# Altium PCB Inchworm_v0.PcbDoc
Units mil, origin at the board's own origin, x right, y up, seen from the top; angles counter-clockwise.
Board outline 1175 x 775 mil, 2 copper layers (Top Layer, Bottom Layer); 41 components, 39 nets, 141 pads, 18 vias.
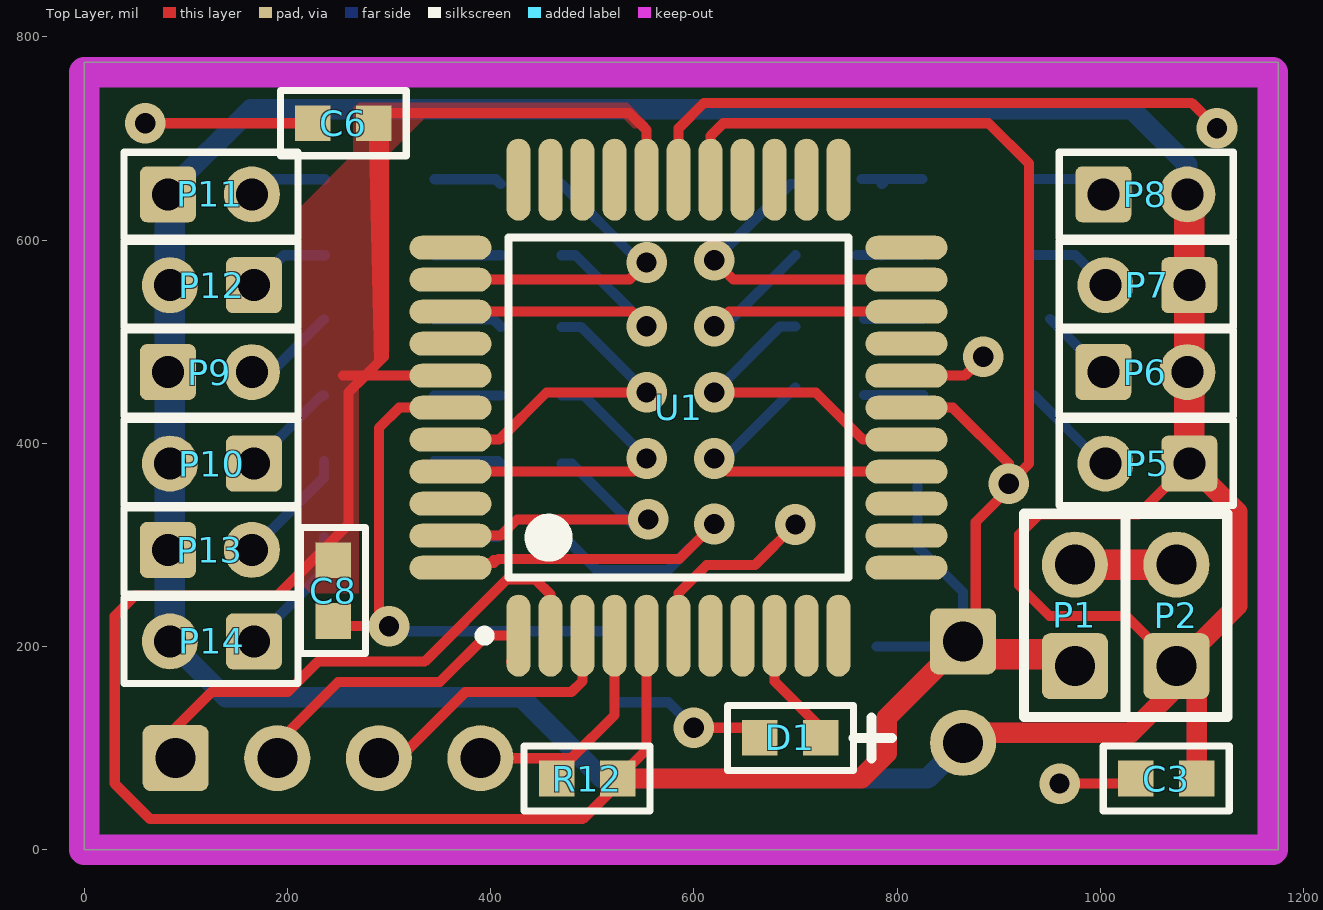
[diagram p0: Top Layer view]
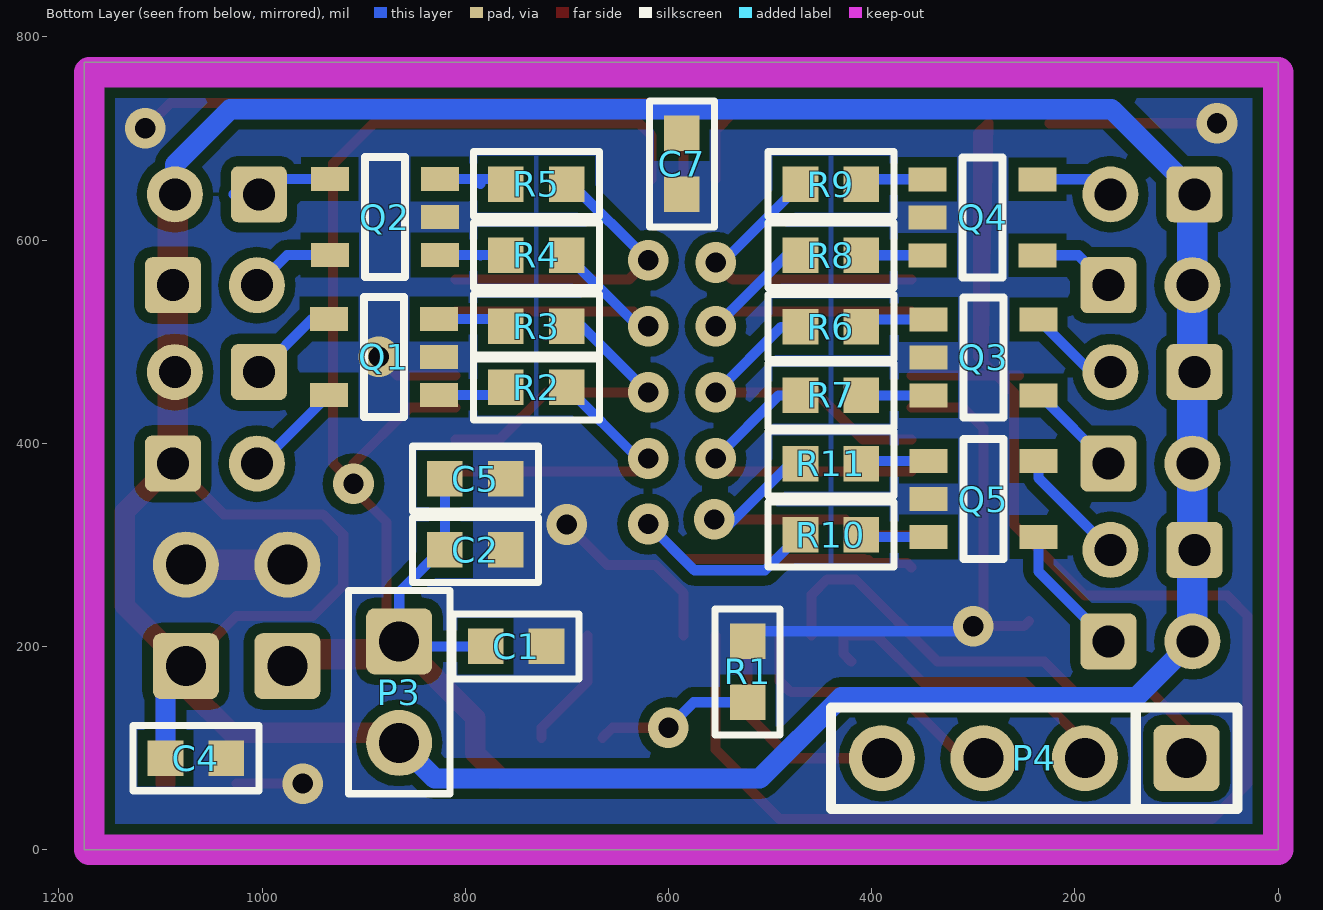
[diagram p1: Bottom Layer view, seen from below]
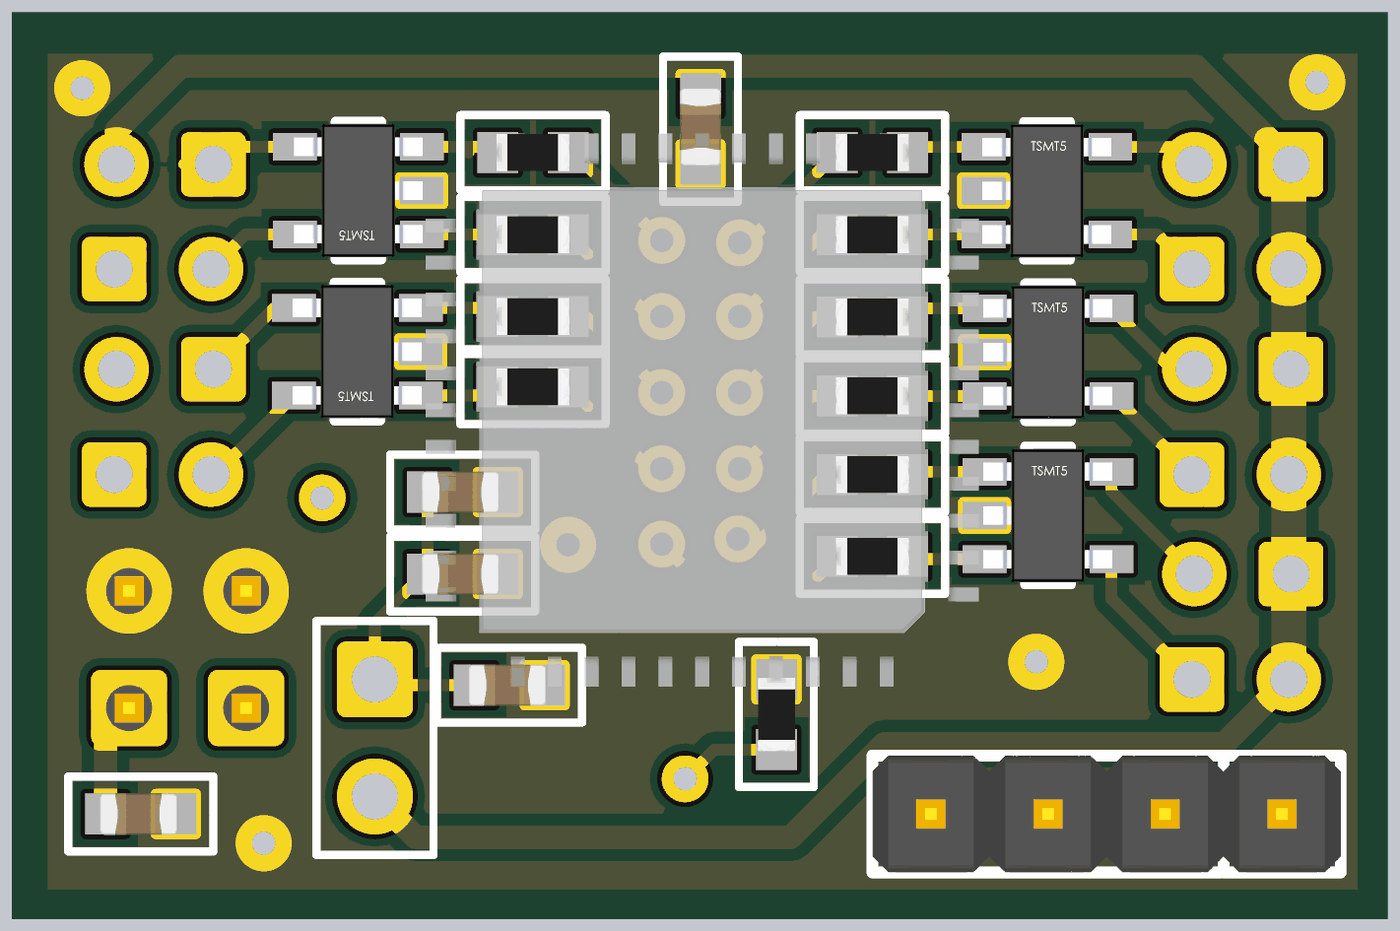
[diagram p2: 3D render of the assembled board from below, using the file's embedded part models]

## Layer stack, top to bottom
Top Solder: solder mask 0.4, Solder Resist, Dk 3.5
Top Layer: signal copper 1.4
Dielectric 1: dielectric 12.6, FR-4, Dk 4.8
Bottom Layer: signal copper 1.4
Bottom Solder: solder mask 0.4, Solder Resist, Dk 3.5

## Board outline
0,0 0,775 1175,775 1175,0

## Design rules (kind name [scope] priority, off if disabled: settings)
Clearance [All] p1: gap=10 ignorepadtopadclearanceinfootprint=TRUE except(0: Arc-Hole Track-Hole SMDPad-Hole THPad-Hole Via-Hole Fill-Hole Poly-Hole Region-Hole Text-Hole)
ComponentClearance [All] p1 off: gap=10 collisioncheckmode=3 verticalgap=10 showdistances=FALSE
HoleSize [All] p1: absolutevalues=TRUE maxlimit=500 minlimit=1 maxpercent=80.000 minpercent=20.000
MinimumSolderMaskSliver [All] p1: minsoldermaskwidth=4
PolygonConnect [All] p1: connectstyle=Direct reliefconductorwidth=10 reliefentries=4 polygonreliefangle="90 Angle" airgapwidth=10
RoutingVias [All] p1: holewidth=20 width=40 viastyle="Through Hole" minholewidth=20 minwidth=40 maxholewidth=28 maxwidth=50
SilkToSilkClearance [All] p1 off: silktosilkclearance=10
SilkToSolderMaskClearance [IsPad] p1 off: minsilkscreentomaskgap=10 clearancetoexposedcopper=TRUE
SolderMaskExpansion [All] p1: expansion=4
Width [All] p1: maxlimit=50 minlimit=10 preferedwidth=10 minimp=50.000000 maximp=50.000000 favimp=50.000000
25 further rules are at their usual default settings.

## Components (designator, comment, footprint, x,y, rotation, side; value= is the part's Value field where it differs from the comment)
C1 "Cap" SMD0603_CAP 750,200 r0 bottom value=2.2uF
C2 "Cap" SMD0603_CAP 790,295 r0 bottom value=100nF
C3 "Cap" SMD0603_CAP 1065,70 r0 top value=10uF
C4 "Cap" SMD0603_CAP 1065,90 r0 bottom value=100nF
C5 "Cap" SMD0603_cap 790,365 r0 bottom value=2.2uF
C6 "Cap" SMD0603_cap 255,715 r0 top value=10uF
C7 "Cap" SMD0603_cap 586.81,675 r90 bottom value=10uF
C8 "Cap" SMD0603_cap 245,255 r90 top value=100nF
D1 "LED" "SMD0603 POLARIZED" 695,110 r180 top
P1 "PWR1" "HEADER 2X1" 975,180.51 r90 top
P2 "PWR2" "HEADER 2X1" 1075,180.51 r90 top
P3 "Via 2x1" "VIA 2X1" 865,205 r270 bottom
P4 "PRGM" "HEADER 4X1" 90,90 r0 bottom
P5 "Header" "VIA 2X1_SMALL" 1046.34,380 r180 top
P6 "Header" "VIA 2X1_SMALL" 1044.34,470 r0 top
P7 "Header" "VIA 2X1_SMALL" 1046.34,555.51 r180 top
P8 "Header" "VIA 2X1_SMALL" 1044.34,645 r0 top
P9 "Header" "VIA 2X1_SMALL" 123.66,470 r0 top
P10 "Header" "VIA 2X1_SMALL" 125.66,380 r180 top
P11 "Header" "VIA 2X1_SMALL" 123.66,645 r0 top
P12 "Header" "VIA 2X1_SMALL" 125.66,555.51 r180 top
P13 "Header" "VIA 2X1_SMALL" 123.66,295 r0 top
P14 "Header" "VIA 2X1_SMALL" 125.66,205 r180 top
Q1 "QS5W1" TSMT5 880,485 r0 bottom
Q2 "QS5W1" TSMT5 879.13,622.6 r0 bottom
Q3 "QS5W1" TSMT5 290,484.49 r180 bottom
Q4 "QS5W1" TSMT5 290.87,622.4 r180 bottom
Q5 "QS5W1" TSMT5 290,345 r180 bottom
R1 "Res" SMD0603_RES 522.01,175 r270 bottom value=470
R2 "Res" SMD0603_RES 730,455 r180 bottom value=470
R3 "Res" SMD0603_RES 730,515 r180 bottom value=470
R4 "Res" SMD0603_RES 730,585 r180 bottom value=470
R5 "Res" SMD0603_RES 730,655 r180 bottom value=470
R6 "Res" SMD0603_RES 440,514.49 r0 bottom value=470
R7 "Res" SMD0603_RES 440,447.09 r0 bottom value=470
R8 "Res" SMD0603_RES 440,585 r0 bottom value=470
R9 "Res" SMD0603_RES 440,655 r0 bottom value=470
R10 "Res" SMD0603_RES 440,310 r180 bottom value=470
R11 "Res" SMD0603_RES 440,380 r180 bottom value=470
R12 "Res" SMD0603_RES 495,70 r0 top value=100k
U1 "ATMega164A-AUR" TQFP44 585,435 r90 top

## Footprints (in the part's own frame and the unit in brackets; to place one, negate y for a bottom-side part, rotate by r counter-clockwise, add the part's x,y. Pads: shape width x height; smd on the part's side, far side on the other; paste and mask are expansions set on the pad)
"HEADER 2X1" [mil] "PinHeader 1x2 TH Pitch 2.54mm"
  rrect25% 65x65 hole 39.37: 1(0,0)
  round 65 hole 39.37: 2(100,0)
  silkscreen extent -50,-50 150,50, body extent -50,-50 150,50, height 374
"HEADER 4X1" [mil] "PinHeader 1x4 TH Pitch 2.54mm"
  rrect25% 65x65 hole 39.37: 1(0,0)
  round 65 hole 39.37: 2(100,0) 3(200,0) 4(300,0)
  silkscreen extent -50,-50 350,50, body extent -50,-50 350,50, height 374
"SMD0603 POLARIZED" [mil]
  rect 35x35 smd: 1(-30,0) 2(30,0)
  silkscreen extent -100,-32 62,32, body extent -31,-16 32,16, height 18
SMD0603_CAP [mil]
  rect 35x35 smd: 1(-30,0) 2(30,0)
  silkscreen extent -62,-32 62,32, body extent -31,-18 35,18, height 35
SMD0603_cap [mil]
  rect 35x35 smd: 1(-30,0) 2(30,0)
  silkscreen extent -62,-32 62,32, body extent -31,-18 35,18, height 35
SMD0603_RES [mil]
  rect 35x35 smd: 1(-30,0) 2(30,0)
  silkscreen extent -62,-32 62,32, body extent -31,-16 31,16, height 18
TQFP44 [mm] "Thin QFP, 44-Leads, Body 10x10mm, Pitch 0.8mm, IPC Low Density"
  oval 2.05x0.6 smd: 1(-5.7,4) 2(-5.7,3.2) 3(-5.7,2.4) 4(-5.7,1.6) 5(-5.7,0.8) 6(-5.7,0) 7(-5.7,-0.8) 8(-5.7,-1.6) 9(-5.7,-2.4) 10(-5.7,-3.2) 11(-5.7,-4) 23(5.7,-4) 24(5.7,-3.2) 25(5.7,-2.4) 26(5.7,-1.6) 27(5.7,-0.8) 28(5.7,0) 29(5.7,0.8) 30(5.7,1.6) 31(5.7,2.4) 32(5.7,3.2) 33(5.7,4)
  oval 0.6x2.05 smd: 12(-4,-5.7) 13(-3.2,-5.7) 14(-2.4,-5.7) 15(-1.6,-5.7) 16(-0.8,-5.7) 17(0,-5.7) 18(0.8,-5.7) 19(1.6,-5.7) 20(2.4,-5.7) 21(3.2,-5.7) 22(4,-5.7) 34(4,5.7) 35(3.2,5.7) 36(2.4,5.7) 37(1.6,5.7) 38(0.8,5.7) 39(0,5.7) 40(-0.8,5.7) 41(-1.6,5.7) 42(-2.4,5.7) 43(-3.2,5.7) 44(-4,5.7)
  silkscreen extent -5.82,-4.25 4.25,4.97, body extent -6,-6.01 6,5.99, height 0.5
TSMT5 [mm] "SOT23, 5-Leads, Body 2.90x2.80mm, Pitch 0.95mm, IPC Medium Density"
  rect 0.95x0.6 smd: 1(-1.375,0.95) 2(-1.375,0) 3(-1.375,-0.95) 4(1.375,-0.95) 5(1.375,0.95)
  silkscreen extent -0.5,-1.5 0.5,1.5, body extent -1.4,-1.45 1.4,1.45, height 1.05
"VIA 2X1" [mil]
  rrect25% 65x65 hole 39.37: 1(0,0)
  round 65 hole 39.37: 2(100,0)
  silkscreen extent -50,-50 150,50
"VIA 2X1_SMALL" [mm] "Via holes for pair of 22-26AWG"
  rrect25% 1.4x1.4 hole 0.8: 1(-1.05,0)
  round 1.4 hole 0.8: 2(1.05,0)
  silkscreen extent -2.15,-1.1 2.2,1.05

## Part data
C1 C2 C3 C4 C5 C6 C7 C8: library part "Capacitor Ceramic", "Ceramic Chip Capacitor"
P1 P2 P5 P6 P7 P8 P9 P10 P11 P12 P13 P14: library part "Header 2x1", "Header, 2-Pin"
P4: library part "Header 4x1"
Q1 Q2 Q3 Q4 Q5: "Two Medium-Power NPN BJTs with Common Emitter.  Rohm Semi."
R1 R2 R3 R4 R5 R6 R7 R8 R9 R10 R11 R12: library part Resistor, "Resistor"

## Via types
v1: diameter 40, hole 20, Top Layer to Bottom Layer, 18 vias

## Nets (pads, with @x,y where several pads share a name; then routed paths per layer and width w, separated by ;. In a path a pad name is that pad's centre, name@x,y a point inside that pad or via, vN(x,y) a via of type N, cw(c..) or ccw(c..) an arc to the next point about the centre after c; other vN are vias at no path point)
GND: C1.1 C2.1 C3.1 C4.1 C5.1 C6.1 C7.1 C8.1 P1.2 P2.2 Q1.2 Q2.2 Q3.2 Q4.2 Q5.2 R1.1 U1.6 U1.18 U1.28 U1.39 | length 1761.5
  Top Layer w10: v1(60,715) C6.1 ; C8.1 250,220 v1(300,220) 290,230 290,415 310,435 U1.39 ; U1.6 585,252.52 612.48,280 660,280 v1(700,320) ; U1.28 585,710 610,735 1090,735 v1(1115,710) ; U1.18 866.5,466.5 v1(885,485) ; v1(960,65) C3.1@1025,65
  Top Layer w30: P1.2 P2.2
  Bottom Layer w10: v1(300,220) 300,215 R1.1@522.01,215
M1: R10.1 U1.44 | length 462.2
  Top Layer w10: U1.44 365.28,282.2 403.03,282.2 403.03,285 406.72,285 407.66,285.95 585.43,285.95 v1(620,320.51)
  Bottom Layer w10: R10.1 505,275 574.49,275 v1(620,320.51)
M2: R11.1 U1.43 | length 313
  Top Layer w10: U1.43 410,309.02 425.98,325 v1(555,325)
  Bottom Layer w10: R11.1 480,380 540,320 545,325 v1(555,325)
MISO: P4.1 U1.2 | length 506.1
  Top Layer w10: P4.1 90,120 125,155 200,155 230,185 335,185 415.94,265.95 444.06,265.95 459.02,250.98 U1.2
MOSI: P4.2 U1.1 | length 325
  Top Layer w10: P4.2 190,105 250,165 350,165 395.59,210.59 U1.1 427.52,192.52 U1.1@420,185
NetD1_1: D1.1 U1.9 | length 119.4
  Top Layer w10: U1.9 679.49,165.51 725,120 D1.1
NetD1_2: D1.2 R1.2 | length 168.8
  Top Layer w10: v1(600,120) 655,120 D1.2
  Bottom Layer w10: R1.2 575,145 v1(600,120) v1@592.01,112.01
NetP5_2: P5.2 Q1.5 | length 95.6
  Bottom Layer w10: Q1.5 P5.2@1001.73,380
NetP6_1: P6.1 Q1.4 | length 74.1
  Bottom Layer w10: Q1.4@950.6,522.4 P6.1
NetP7_2: P7.2 Q2.5 | length 84
  Bottom Layer w10: Q2.5 975.31,585.2 P7.2
NetP8_1: P8.1 Q2.4 | length 75.9
  Bottom Layer w10: Q2.4 P8.1@988,660 ; P8.1@1013,660 P8.1@1028,645
NetP9_2: P9.2 Q3.5 | length 92.4
  Bottom Layer w10: P9.2 183.98,470 Q3.5
NetP10_1: P10.1 Q3.4 | length 96.7
  Bottom Layer w10: P10.1 234.09,447.09 Q3.4
NetP11_2: P11.2 Q4.5 | length 77.9
  Bottom Layer w10: P11.2 179.8,659.8 Q4.5
NetP12_1: P12.1 Q4.4 | length 81.9
  Bottom Layer w10: P12.1 196.49,585 Q4.4
NetP13_2: P13.2 Q5.5 | length 116.8
  Bottom Layer w10: P13.2 235.87,365.87 Q5.5
NetP14_1: P14.1 Q5.4 | length 131.1
  Bottom Layer w10: P14.1 235.87,273.87 Q5.4
NetQ1_1: Q1.1 R2.1 | length 58.5
  Bottom Layer w10: R2.1@767.4,447.6 Q1.1
NetQ1_3: Q1.3 R3.1 | length 58.5
  Bottom Layer w10: R3.1@767.4,522.4 Q1.3
NetQ2_1: Q2.1 R4.1 | length 65.1
  Bottom Layer w10: R4.1@760.2,585.2 Q2.1 ; 785,585 785.2,585.2
NetQ2_3: Q2.3 R5.1 | length 67.1
  Bottom Layer w10: R5.1@765,660 Q2.3 ; 785,655 790,660
NetQ3_1: Q3.1 R6.1 | length 68.9
  Bottom Layer w10: Q3.1 402.6,521.89 R6.1
NetQ3_3: Q3.3 R7.1 | length 65.9
  Bottom Layer w10: Q3.3 R7.1
NetQ4_1: Q4.1 R9.1 | length 67
  Bottom Layer w10: Q4.1 405.2,659.8 R9.1
NetQ4_3: Q4.3 R8.1 | length 65
  Bottom Layer w10: Q4.3 R8.1
NetQ5_1: Q5.1 R11.2 | length 66.9
  Bottom Layer w10: Q5.1 407.6,382.4 R11.2
NetQ5_3: Q5.3 R10.2 | length 66.9
  Bottom Layer w10: Q5.3 407.6,307.6 R10.2
RST: P4.4 R12.1 U1.4 | length 227.7
  Top Layer w10: P4.4 479.49,90 522.01,132.52 U1.4
SCK: P4.3 U1.3 | length 276.6
  Top Layer w10: P4.3 310,90 375,155 479.49,155 490.51,166.02 U1.3
V1_A: R2.2 U1.15 | length 303.8
  Top Layer w10: v1(620,385) 632.99,372.01 U1.15
  Bottom Layer w10: v1(620,385) 630,385 R2.2
V1_B: R6.2 U1.40 | length 322.4
  Top Layer w10: U1.40 408.5,403.5 455,450 v1(553.5,450)
  Bottom Layer w10: R6.2 489.02,514.49 v1(553.5,450)
V2_A: R3.2 U1.16 | length 315.6
  Top Layer w10: v1(620,450) 720,450 766.5,403.5 U1.16
  Bottom Layer w10: v1(620,450) 685,515 R3.2
V2_B: R7.2 U1.41 | length 307.5
  Top Layer w10: U1.41 540.51,372.01 v1(553.5,385)
  Bottom Layer w10: R7.2 491.42,447.09 v1(553.5,385)
V3_A: R4.2 U1.20 | length 304.4
  Top Layer w10: v1(620,515) 634.49,529.49 U1.20
  Bottom Layer w10: v1(620,515) 630,515 R4.2
V3_B: R8.2 U1.36 | length 311.4
  Top Layer w10: U1.36 539.02,529.49 v1(553.5,515)
  Bottom Layer w10: R8.2 483.5,585 v1(553.5,515)
V+: C3.2 C4.2 C7.2 P2.1 P3.2 P5.1 P6.2 P7.1 P8.2 P9.1 P10.2 P11.1 P12.2 P13.1 P14.2 | length 3832.7
  Top Layer w10: P2.1@1075.51,180.51 P2.1 1025.51,230 950,230 920,260 920,310 940,330 1037.68,330 P5.1
  Top Layer w20: P3.2 875,115 1030,115 1075,160 P2.1 1095,160.51 C3.2 C3.2@1095,65 ; P2.1@1075.51,180.51 1135,240 1135,332.68 P5.1 ; P8.2 P8.2@1087.68,643
  Top Layer w30: P5.1 P7.1 P8.2@1087.68,643
  Bottom Layer w10: P2.1 P2.1@1075,185 ; P5.1@1087.68,377.32 P5.1
  Bottom Layer w20: P14.2 139.32,150 430,150 510,70 830,70 P3.2 ; P11.1@84.32,649.32 163.84,728.84 1031.16,728.84 1085.68,674.32 P8.2 ; P2.1@1075,160 P2.1 1095,160.51 C4.2 ; P5.1@1085.68,382 P5.1
  Bottom Layer w30: P14.2 P10.2 P12.2 P11.1@84.32,649.32
Vdd: C1.2 C2.2 C5.2 C6.2 C8.2 P1.1 P3.1 R12.2 U1.5 U1.17 U1.27 U1.29 U1.38 | length 4020.6
  Top Layer w10: 255,466.5 276.5,466.5 ; C6.2@295,725 536.57,725 553.5,708.07 U1.29 ; U1.38 276.5,466.5 ; U1.5 553.5,98.5 R12.2 525,64.49 490.51,30 65,30 30,65 30,230 50,250 190,250 260,320 260,450 276.5,466.5 ; U1.27 616.5,702.48 629.02,715 890,715 930,675 930,380 v1(910,360) 910,355 877.48,322.48 P3.1@877.48,192.52 ; U1.17 855,435 910,380 v1@910,375 ; 276.5,466.5 290,480 ; 290,480 295,485 295,705 C6.2 290,480
  Top Layer w20: R12.2 765,70 790,95 790,130 P3.1 P3.1@877.48,192.52
  Top Layer w30: P3.1@877.48,192.52 962.99,192.52 P1.1
  Bottom Layer w10: C1.2 860,200 P3.1 ; C5.2@820,375 C5.2 820,298.57 865,253.57 P3.1 ; P3.1@850,205 P3.1
VE_A: R5.2 U1.21 | length 308.4
  Top Layer w10: v1(620,580) 639.02,560.98 U1.21
  Bottom Layer w10: v1(620,580) 695,655 R5.2
VE_B: R9.2 U1.35 | length 315.4
  Top Layer w10: U1.35 536.57,560.98 v1(553.5,577.91)
  Bottom Layer w10: R9.2 547.09,577.91 v1(553.5,577.91)
pads on no net: U1.7 U1.8 U1.10 U1.11 U1.12 U1.13 U1.14 U1.19 U1.22 U1.23 U1.24 U1.25 U1.26 U1.30 U1.31 U1.32 U1.33 U1.34 U1.37 U1.42

## Polygon pours and split planes (outlines as drawn)
no net on Drill Drawing (solid): 0,0
Vdd on Top Layer "vdd_top" (solid, remove dead copper, pour order 4): 560,710 535,735 270,735 265,730 265,685 210,630 210,265 230,245 262.48,245 270,252.52 270,460 300,490 300,685 335,720 530.51,720 540.51,710
GND on Bottom Layer "gnd_bot" (solid, remove dead copper, pour order 0): 0,0 0,775 1175,775 1175,0

## Keep-outs
Keep-Out Layer:
  lines w30: 0,0 1170,0 1170,765 0,765 0,0

## Silkscreen, mask and mechanical layers (free items; w line width, h text height)
Mechanical 1:
  lines w30: 0,0 1170,0 1170,765 0,765 0,0